# Altium PCB main_old.PcbDoc (part 15 of 15)
Units mil, origin at the board's own origin, x right, y up, seen from the top; angles counter-clockwise.
Board outline 8394.55 x 5164.44 mil, 7 copper layers (Top Layer 1, Layer 2, Layer 3, Unused, Layer 4_pow, Layer 5_gnd, Bottom 6+gnd), stack 46.112 mil thick; 363 components, 409 nets, 1750 pads, 991 vias.
Unrouted connection lines stored in the file: 1.
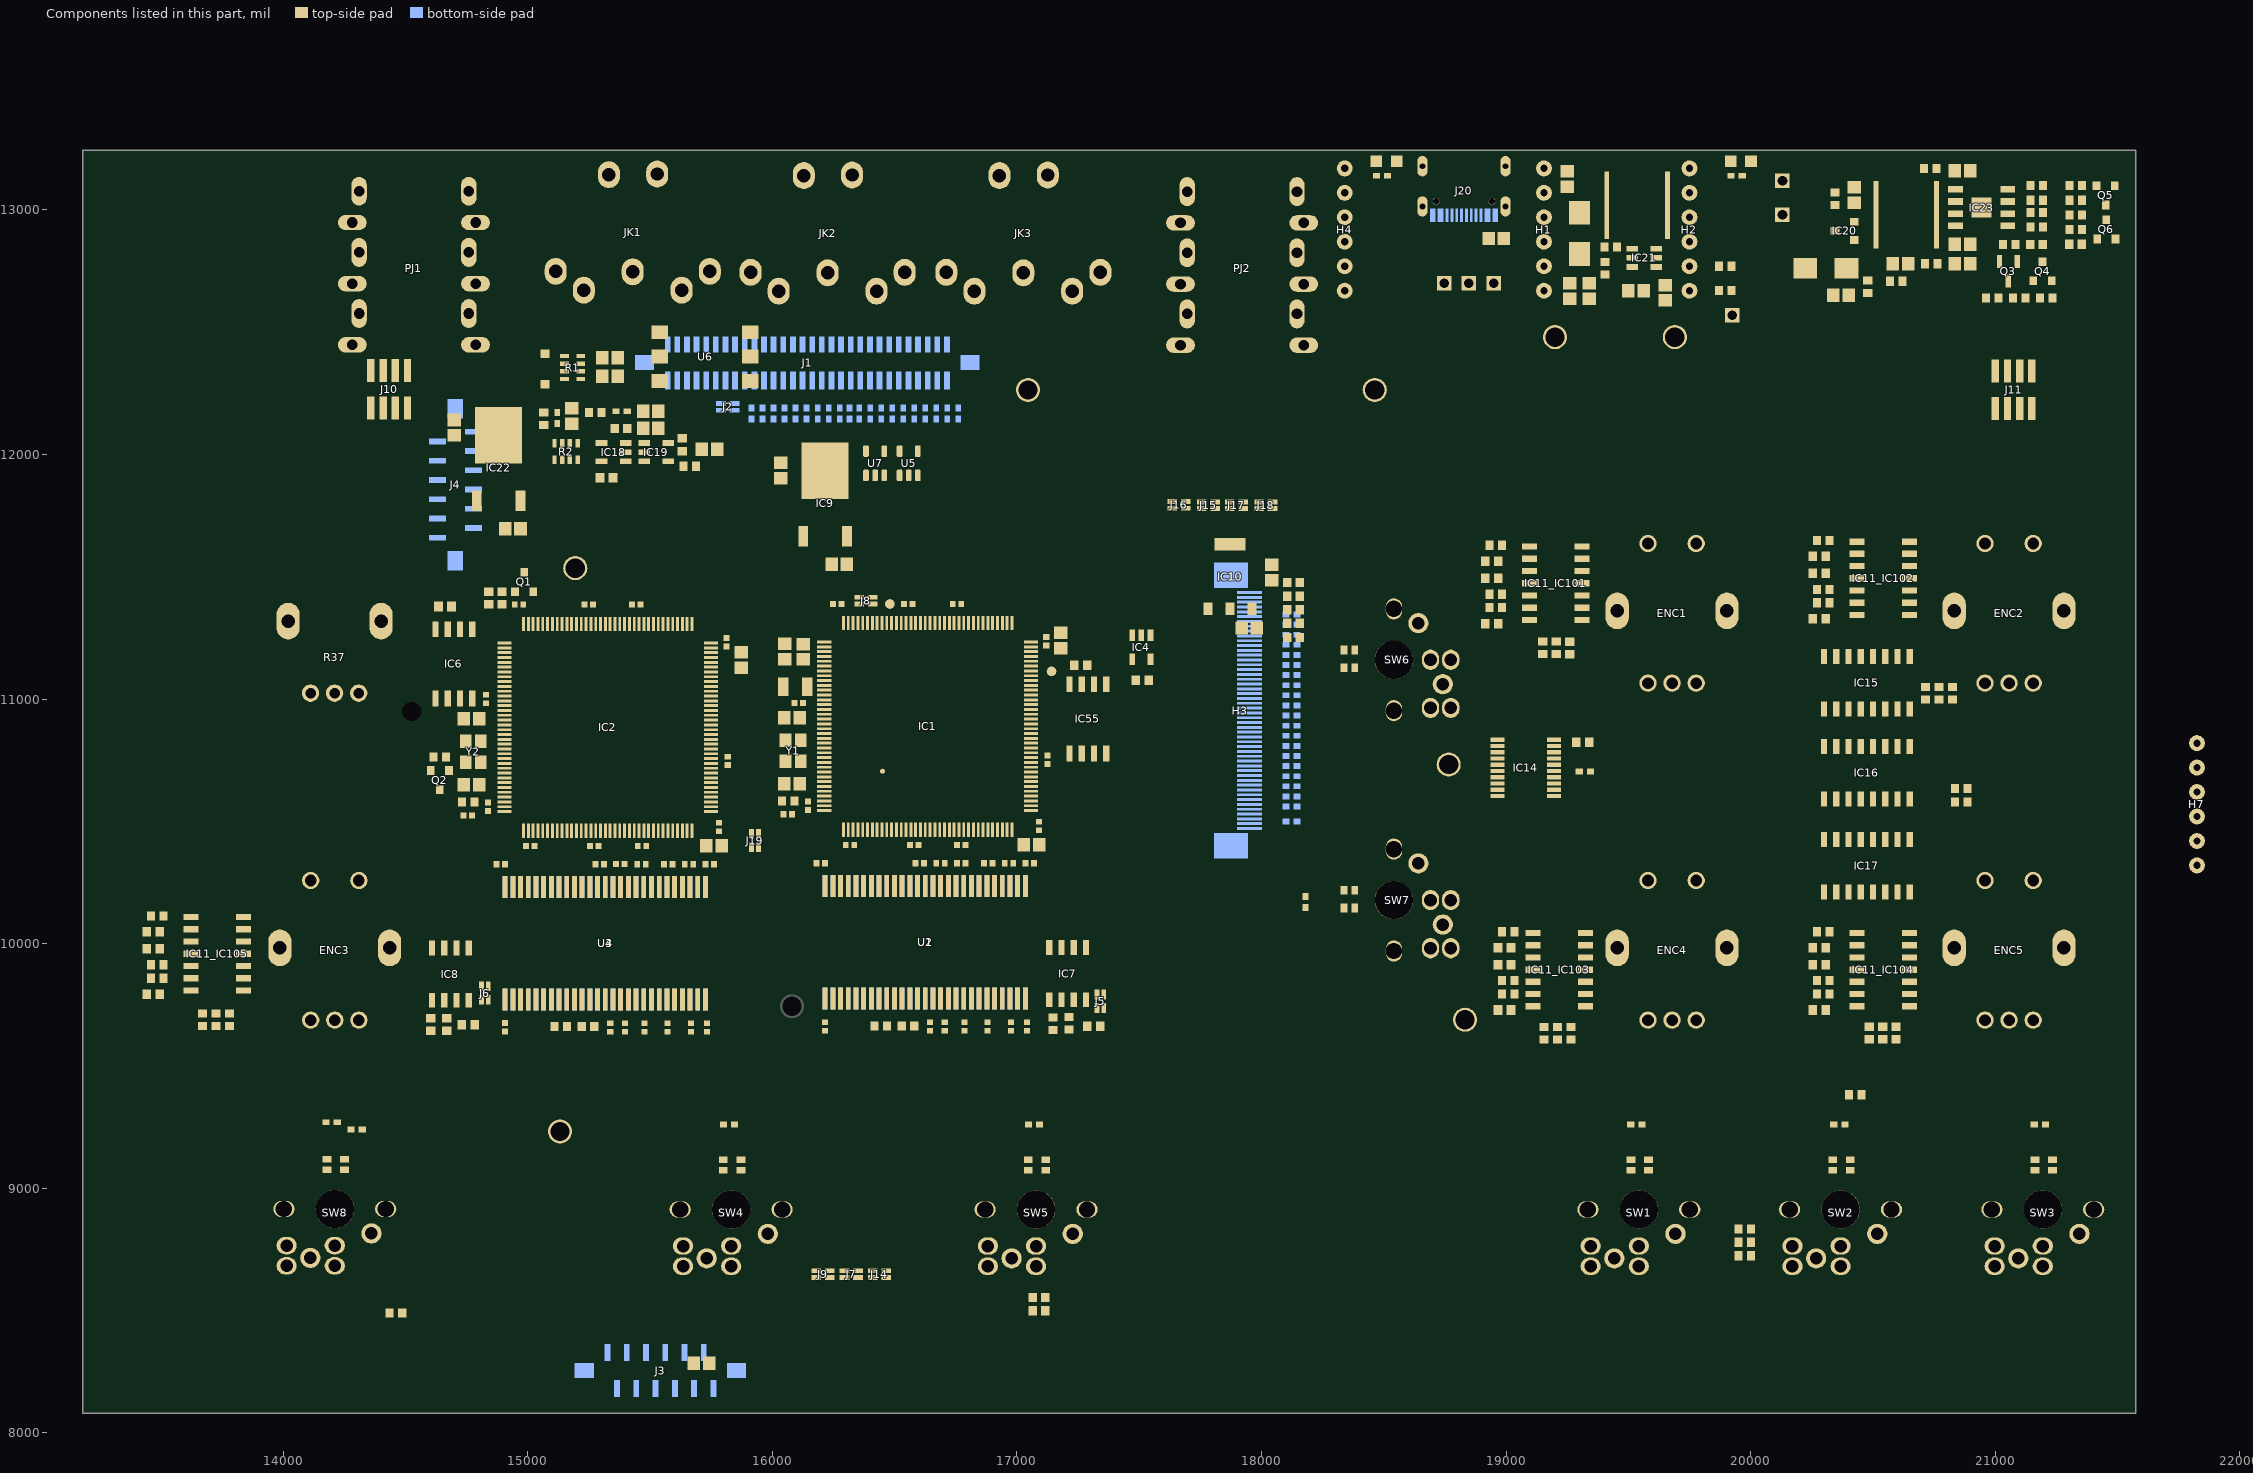
[diagram p18: the components of this part, seen from the top]

## Polygon pours and split planes (outlines as drawn) (continued)
no net on Layer 3 "NONET_L03_P015" (solid, remove dead copper, pour order 15): 16672.11,10390.53 16670,10405 16720,10405 16720,10359.12 16719.24,10358.37 16719.24,10165.76 16720,10165 16655,10165 16655,10357.12 16672.11,10374.23 16670,10376.35
no net on Layer 3 "NONET_L03_P018" (solid, remove dead copper, pour order 18): 15363.81,10386.34 15361.7,10400.81 15411.7,10400.81 15411.7,10354.93 15410.94,10354.18 15410.94,10161.57 15411.7,10160.81 15346.7,10160.81 15346.7,10352.93 15363.81,10370.04 15361.7,10372.16
no net on Layer 3 "NONET_L03_P019" (solid, remove dead copper, pour order 19): 15550.68,10400.81 15600.68,10400.81 15600.68,10354.93 15599.92,10354.18 15599.92,10161.57 15600.68,10160.81 15535.68,10160.81 15535.68,10352.93 15552.79,10370.04 15550.68,10372.16
no net on Layer 3 "NONET_L03_P020" (solid, remove dead copper, pour order 20): 15271.7,10855.81 15346.7,10855.81 15346.7,10742.93 15332.58,10728.8 15332.58,10714.76 15285.99,10714.76 15271.7,10729.04 15271.7,10745.81
GND on Layer 3 "GND_L03_P021" (solid, remove dead copper, pour order 21): 15501.7,10935.81 15521.8,10915.71 15521.8,10760.55 15490.06,10728.8 15490.06,10705.81 15450.5,10707.1 15458.15,10736.83 15458.15,10892.26
GND on Top Layer 1 "NONET_L01_P-001" (solid, remove dead copper, pour order 23): 16007.09,11422.2 17411.5,11424.28 17411.5,9612.2 16007.09,9612.2
GND on Top Layer 1 "NONET_L01_P-001" (solid, remove dead copper, pour order 22): 15933.33,9610.26 14566.25,9610.26 14566.25,11423.25 15928.33,11425.26 15928.33,9615.26
NetD3_1 on Top Layer 1 "NETD3_1_L01_P057" (solid, remove dead copper, pour order 57): 19338.3,12940 19419.81,12940 19419.81,13040 19325.8,13040
+V_SYS on Top Layer 1 "+V_SYS_L01_P069" (solid, pour order 69): 20385.28,13045.28 20390,13050 20390,13125.04 20375.04,13140 20280,13140 20190,13050 20060,13050 19960.01,13149.99 19869.81,13149.99 19869.81,13059.81 19797.62,12987.62 19797.62,12879.74 20219.74,12879.74 20290,12950 20290,13020.47 20314.8,13045.28
V_BAT on Top Layer 1 "V_BAT_L01_P070" (solid, remove dead copper, pour order 70): 20070,13070 20180,13070 20270,13160 20419.58,13160 20440.78,13138.8 20423.39,13121.4 20423.39,12976.61 20450,12950 20450,12920 20580,12850 20511.38,12987.78 20579.74,13090 20580,13200 20540,13240 20090,13240 20050,13200 20050,13090
NetC92_2 on Top Layer 1 "NONET_L01_P-001" (solid, remove dead copper, pour order 65): 20299.17,12872.67 20174.78,12804.67 20319.17,12670 20363.07,12667.77 20362.61,12693.14 20355.47,12696.94 20319.17,12697.24 20319.17,12812.03 20319.17,12830.11 20359.17,12830.11 20359.17,13030.11 20309.17,13030.11 20299.17,13020.11
+V_SYS on Top Layer 1 "NONET_L01_P-001" (solid, remove dead copper, pour order 54): 19922.36,12999.99 19935.93,13013.56 19935.93,13083.88 19869.81,13149.99 19674.81,13149.99 19674.81,12805.87 19795.87,12805.87 19890,12900 19890,12999.99
+V_SYS on Top Layer 1 "+V_SYS_L01_P055" (solid, remove dead copper, pour order 55): 19545.6,12647.54 19701.22,12653.11 19701.22,12878.78 19675.6,12904.4 19585.6,12904.4 19565.6,12884.4 19565.6,12704.4 19545.6,12684.4
+5V on Top Layer 1 "+5V_L01_P056" (solid, remove dead copper, pour order 56): 19195.6,12714.21 19235.4,12674.4 19375.6,12674.4 19375.6,12884.4 19365.6,12894.4 19305.6,12894.4 19265.6,12934.4 19265.6,13119.99 19195.6,13119.99
GND on Top Layer 1 "GND_L01_P058" (solid, remove dead copper, pour order 58): 19399.81,12719.99 19435.01,12762.85 19435.01,12884.4 19545.6,12884.4 19545.6,12724.4 19484.02,12639.99 19428.84,12639.99 19383.74,12700.43
+MCU on Layer 2 "NONET_L01_P-001" (solid, remove dead copper, pour order 24): 16009.17,11423.82 17405,11423.82 17405,9612.8 16009.17,9612.8
+5V on Layer 2 "+5V_L02_P030" (solid, pour order 30): 13180,13250 13180,8080 21575,8080 21580,8085 21575,8090 21575,13245
+MCU on Layer 2 "NONET_L01_P-001" (solid, remove dead copper, pour order 25): 15931.25,11421.87 14566.25,11421.87 14566.25,9610.85 15931.25,9610.85
GND on Layer 2 "NONET_L01_P-001" (solid, remove dead copper, pour order 64): 20299.02,12560 20299.02,13240 21519.02,13240 21519.02,12560
GND on Bottom 6+gnd "GND_L07_P029" (solid, remove dead copper, pour order 29): 16011.74,11974.96 17405,11974.96 17405,10163.93 16011.74,10163.93
GND on Bottom 6+gnd "GND_L07_P071" (solid, remove dead copper, pour order 71): 13175,13240 13180,13235 13180,8080 21575,8080 21575,13245
GND on Bottom 6+gnd "GND_L07_P017" (solid, remove dead copper, pour order 17): 15933.81,11973.01 14566.25,11973.01 14566.25,10161.99 15933.81,10161.99
+5V_Out on Bottom 6+gnd "NONET_L02_P-001" (solid, remove dead copper, pour order 16): 15765,12140 15867.64,12140 15893.35,12165.71 15893.35,12203.35 15945,12255 15945,12515 15940,12520 15765,12520 15750,12505 15750,12150
GND on Layer 5_gnd "GND_L06_P033" (solid, pour order 33): 13180,13250 13170,13240 13170,8075 21570,8075 21575,8080 21575,13245

## Silkscreen, mask and mechanical layers (free items; w line width, h text height)
Top Overlay:
  circle w10: c19690,12480 r88.03
  circle w10: c19200,12480 r88.03
  lines w5: 19700.2,12639.13 19700.2,12780.86 ; 20149.41,12689.13 20149.41,12830.87 ; 21007.8,12886.93 20974.02,12835 20974.02,12735 20914.02,12670 20914.02,12595 21269.02,12595 21269.02,12775 21269.02,12835 21218.98,12886.93
  lines w10: 14210.63,9913.19 14210.63,9982.6 ; 16180,8708.82 16180,8738.82 16350,8738.82 ; 16235,8588.82 16235,8573.82 16295,8573.82 16295,8588.82 ; 16465,8713.82 16465,8738.82 16410,8738.82 ; 17605,11648.82 17690,11648.82 17690,11688.82 ; 17605,11728.82 17635,11728.82 ; 17635,11748.82 17635,11728.82 ; 17690,11748.82 17690,11688.82 ; 17755,11748.82 17755,11728.82 ; 17815,11748.82 17815,11688.82 ; 17925,11693.82 17925,11748.82 ; 17990,11748.82 17990,11728.82 17870,11728.82 ; 18045,11743.82 18045,11688.82 17935,11688.82 17815,11688.82 ; 16350,8738.82 16410,8738.82 ; 16350,8738.82 16350,8713.82 16350,8738.82 ; 16410,8738.82 16410,8713.82 16410,8738.82 ; 17635,11728.82 17755,11728.82 ; 17690,11688.82 17815,11688.82 ; 17755,11728.82 17870,11728.82 ; 17870,11728.82 17870,11748.82 17870,11728.82
  text "SWD" at 17590,11698.82 h24 r90
  text "ADC" at 17595,11608.82 h24 r90
  text "SPI" at 16285,8753.82 h24
  text "I2C" at 16235,8533.82 h24
Bottom Overlay:
  lines w10: 18279.81,12380 18279.81,13239.99 19829.81,13239.99 19829.81,12380 18279.81,12380
Board Shape:
  lines w10: 13180.25,8079.59 13180.25,8670.67 13180.25,13244.04 21574.8,13244.04 21574.8,8670.67 21574.8,8079.59 13180.25,8079.59 ; 18274.81,12549.99 19824.81,12549.99 19824.81,13244.99 18274.81,13244.99 18274.81,12549.99
Outline:
  circle w0.5: c14210.88,12441.31 r19.68
  circle w0.5: c14210.88,12086.98 r19.68
  circle w0.5: c14683.32,12441.31 r19.68
  circle w0.5: c14683.32,12086.98 r19.68
  circle w0.5: c15155.76,12441.31 r19.68
  circle w0.5: c15155.76,12086.98 r19.68
  circle w0.5: c15628.2,12441.31 r19.68
  circle w0.5: c15628.2,12086.98 r19.68
  circle w0.5: c16100.64,12441.31 r19.68
  circle w0.5: c16100.64,12086.98 r19.68
  circle w0.5: c16573.08,12441.31 r19.68
  circle w0.5: c16573.08,12086.98 r19.68
  circle w0.5: c17045.52,12441.31 r19.68
  circle w0.5: c17045.52,12086.98 r19.68
  circle w0.5: c17517.96,12441.31 r19.68
  circle w0.5: c17517.96,12086.98 r19.68
  circle w0.5: c17990.4,12441.31 r19.68
  circle w0.5: c17990.4,12086.98 r19.68
  circle w0.5: c18462.85,12441.31 r19.68
  circle w0.5: c18462.85,12086.98 r19.68
  circle w0.5: c18935.29,12441.31 r19.68
  circle w0.5: c18935.29,12086.98 r19.68
  circle w0.5: c19407.73,12441.31 r19.68
  circle w0.5: c19407.73,12086.98 r19.68
  circle w0.5: c19880.17,12441.31 r19.68
  circle w0.5: c19880.17,12086.98 r19.68
  circle w0.5: c20352.61,12441.31 r19.68
  circle w0.5: c20352.61,12086.98 r19.68
  circle w0.5: c20825.05,12441.31 r19.68
  circle w0.5: c20825.05,12086.98 r19.68
  circle w0.5: c21297.49,12441.31 r19.68
  circle w0.5: c21297.49,12086.98 r19.68
  circle w10: c21194.5,8913.12 r59.06
  circle w10: c20367.72,8913.12 r59.06
  circle w10: c19542.61,8913.12 r59.06
  circle w10: c21056.7,11360.55 r59.06
  circle w10: c21056.7,9982.6 r59.06
  circle w10: c19678.75,9982.6 r59.06
  circle w10: c19678.75,11360.55 r59.06
  circle w10: c18541.34,10178.22 r59.06
  circle w10: c18541.34,11160.81 r59.06
  circle w10: c15831.38,8913.12 r59.06
  circle w10: c17078.06,8913.12 r59.06
  circle w10: c14210.63,9982.6 r59.06
  circle w10: c14210.63,11360.55 r59.06
  lines w10: 13180.25,8670.67 13180.25,13244.04 21574.8,13244.04 21574.8,8670.67 ; 13180.25,8670.67 13180.25,8079.59 21574.8,8079.59 21574.8,8670.67 ; 13180.25,8670.67 21574.8,8670.67 ; 18935.29,12086.98 18935.29,12086.98

## Text inside footprints (layer, text, board x,y; h text height)
H3: Bottom Overlay "50" at 18030.42,11431.28 h25 r270; Bottom Overlay "45" at 18030.42,11332.85 h25 r270; Bottom Overlay "40" at 18030.42,11234.43 h25 r270; Bottom Overlay "35" at 18030.42,11136 h25 r270; Bottom Overlay "30" at 18030.42,11037.58 h25 r270; Bottom Overlay "25" at 18030.42,10939.15 h25 r270; Bottom Overlay "20" at 18030.42,10840.73 h25 r270; Bottom Overlay "15" at 18030.42,10742.3 h25 r270; Bottom Overlay "10" at 18030.42,10643.87 h25 r270; Bottom Overlay "5" at 18030.42,10545.45 h25 r270; Bottom Overlay "1" at 18030.42,10466.71 h25 r270